# Altium PCB PCB.PcbDoc (part 2 of 2)
Units mil, origin at the board's own origin, x right, y up, seen from the top; angles counter-clockwise.
Board outline 2657.48 x 2755.91 mil, 2 copper layers (Top Layer, Bottom Layer), stack 62.2 mil thick; 84 components, 72 nets, 315 pads, 78 vias.
Unrouted connection lines stored in the file: 31.
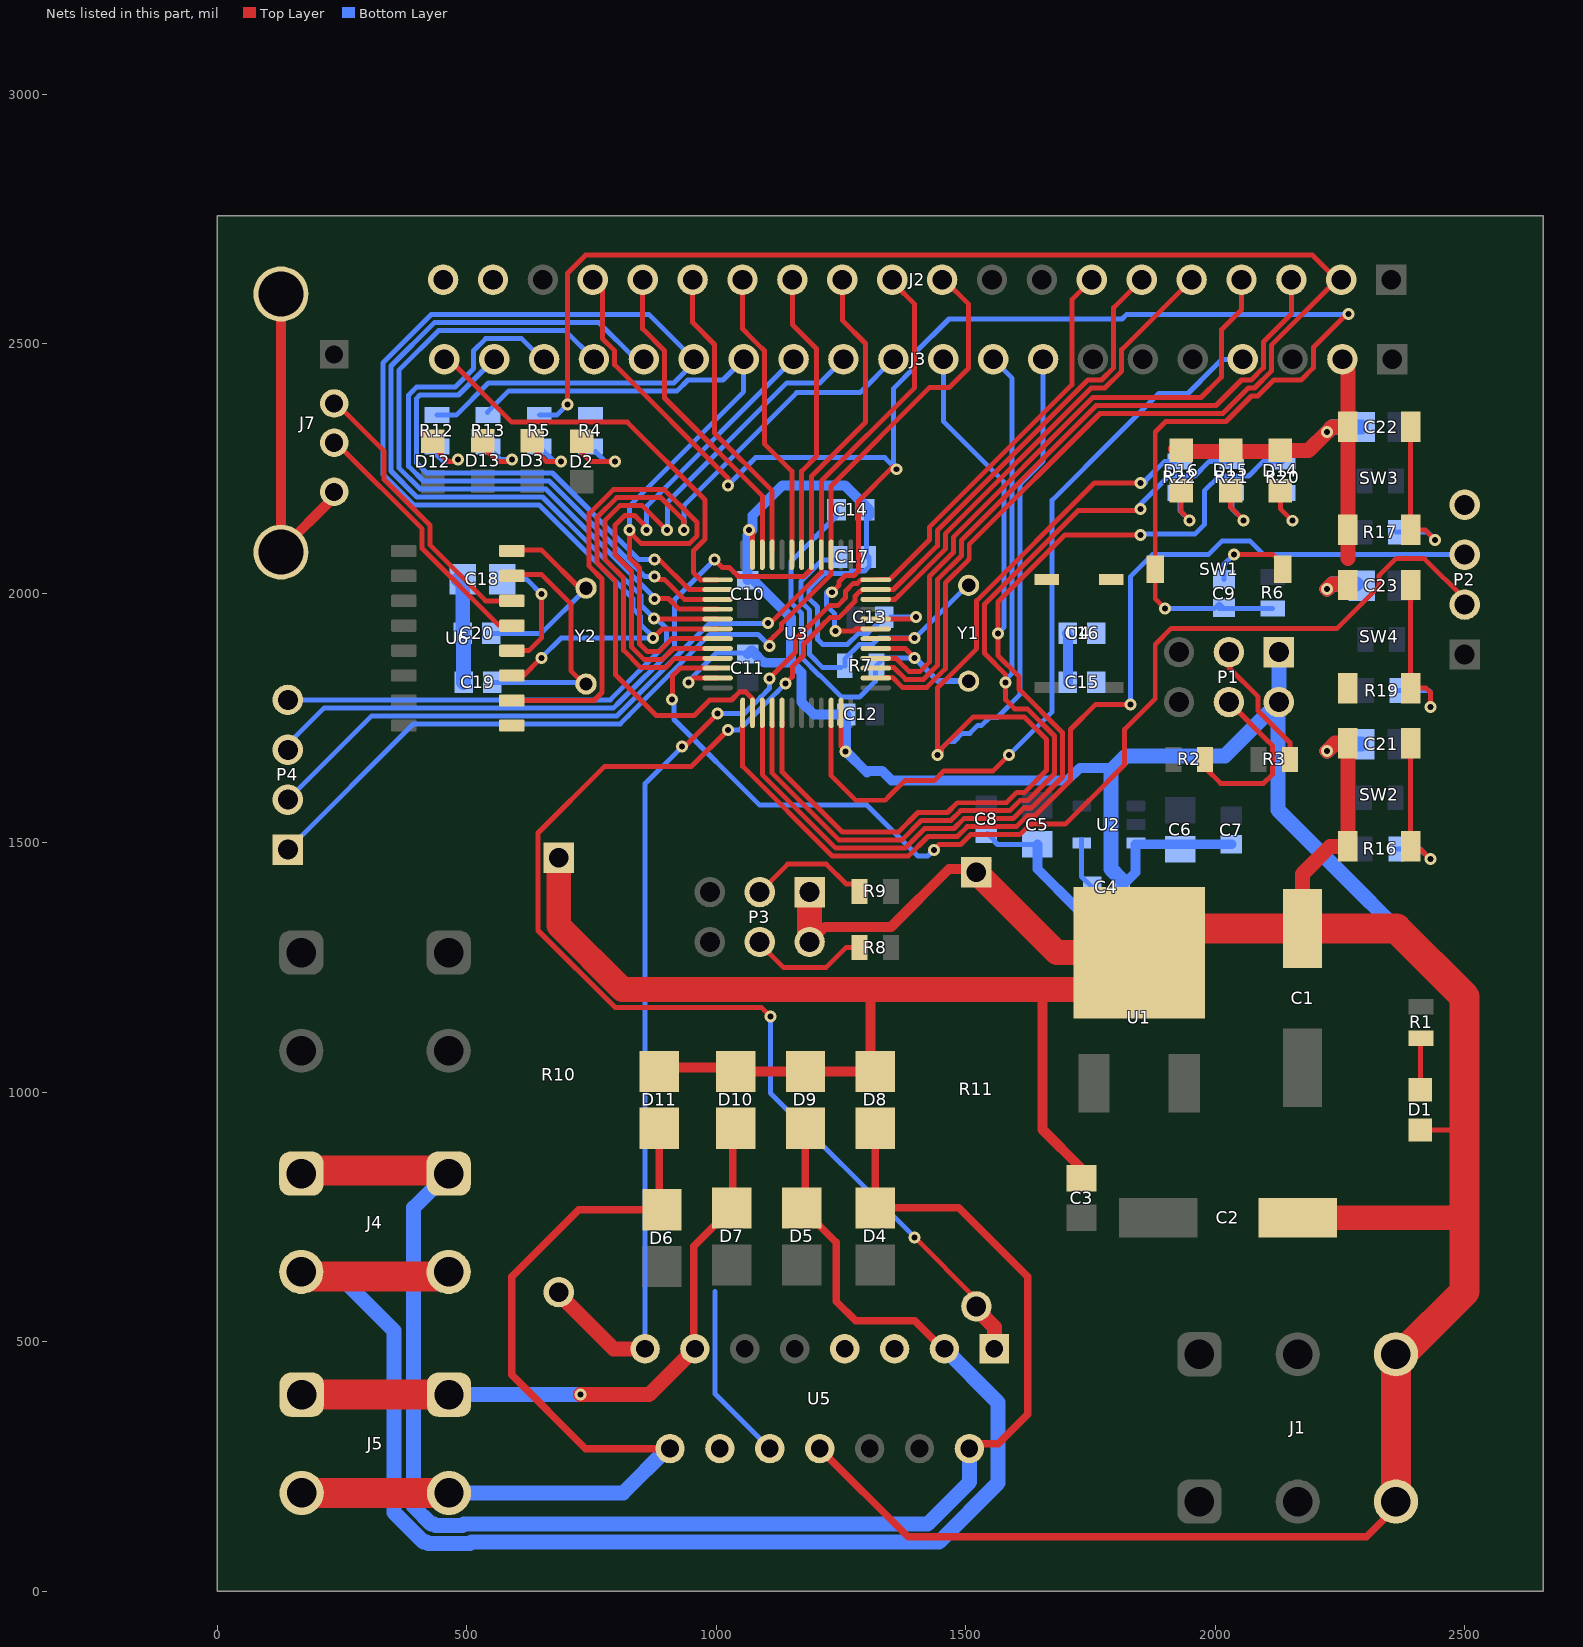
[diagram p2: the nets of this part, all layers, seen from the top]

## Via types
v1: diameter 24, hole 12, Top Layer to Bottom Layer, 77 vias
v2: diameter 50, hole 24, Top Layer to Bottom Layer, 1 vias

## Nets (pads, with @x,y where several pads share a name; then routed paths per layer and width w, separated by ;. In a path a pad name is that pad's centre, name@x,y a point inside that pad or via, vN(x,y) a via of type N, cw(c..) or ccw(c..) an arc to the next point about the centre after c; other vN are vias at no path point) (continued)
GND: C1.1 C2.1 C3.1 C4.1 C5.1 C6.1 C7.1 C8.1 C10.1 C11.1 C12.1 C13.1 C14.2 C15.2 C16.2 C17.2 C18.2 C19.2 C20.2 C21.1 C22.1 C23.1 D1.2 D8.2 D9.2 D10.2 D11.2 D14.2 D15.2 D16.2 J1.3 J2.19 J2.20 J3.2 J7.4 J7.5 J7.6 P1.1 P1.2 P2.4 P3.1 P3.2 R4.2 R10.1 R11.1 SW2.3 SW2.4 SW3.3 SW3.4 SW4.3 SW4.4 U1.4 U2.3 U3.8 U3.23 U3.35 U3.47 U5.8 U6.1 | length 14428
  Top Layer w10: v1(944.88,1820.87) 953.74,1829.72 U3.35@1002.95,1829.72 ; v1(1065.52,2125.98) 1072.83,2125.98 U3.23@1072.83,2076.77 ; U3.47@1250,1759.84 1250,1692.91 v1@1259.84,1683.07 ; U3.8@1319.88,1947.83 1396.65,1947.83 v1@1397.64,1948.82 ; D1.2@2411.38,923.85 2500,923.85 2508.5,923.85 2509.84,925.2
  Top Layer w15: U5.8@1207.48,285.43 1384.65,108.27 2303.15,108.27 2352.36,157.48 J1.3@2352.36,177.17
  Top Layer w20: J7.5@127.8,2603.61 J7.5@127.8,2599.24 127.8,2086.29 234.49,2192.98 J7.4@234.49,2202.79 J7.4@234.49,2207.16 ; D11.2@899.1,1049.21 D10.2@1032,1049.21 ; D10.2@1039.06,1041.34 1169.29,1041.34 1171.26,1043.31 1173.23,1041.34 D9.2@1178.98,1041.34 D8.2@1318.9,1041.34 ; P3.2@1187.2,1314.22 P3.2@1187.2,1300.65 1217.71,1331.16 1350.85,1331.16 1466.54,1446.85 R11.1@1509.92,1446.85 ; D8.2@1309.06,1061.02 1309.06,1200.79 ; 1653.54,1205.71 1653.54,925.2 C3.1@1732.28,846.46
  Top Layer w30: D16.2@1920.87,2288.9 D16.2@1923.93,2285.84 ; D16.2@1927.81,2283.46 D15.2@2017.72,2283.46 ; D15.2@2027.56,2283.46 2125.51,2283.46 D14.2@2126.65,2284.6 ; D14.2@2130.51,2285.7 2187.27,2285.7 v1(2224.41,2322.83) 2234.25,2332.68 SW3.3@2253.94,2332.68 ; C1.1@2175.2,1377.95 2175.2,1437.01 2230.47,1492.28 SW2.4@2265.75,1492.28 SW2.3@2265.75,1698.98 2240.31,1698.98 v1(2224.41,1683.07) ; v1(2224.41,2007.87) 2234.25,2017.72 SW4.3@2265.75,2017.72 ; J3.2@2253.94,2480.32 2265.75,2468.5 2265.75,2126.46 2265.76,2068.91
  Top Layer w50: R10.1@684.55,1469.44 684.55,1333.17 812.01,1205.71 1653.54,1205.71 U1.4@1756.41,1205.71 ; P3.2@1187.2,1314.22 P3.1@1187.2,1400.65 ; R11.1@1521.41,1440.71 1682.73,1279.39 U1.4@1847.68,1279.39 ; C2.1@2165.35,748.03 2490.16,748.03 2500,757.87
  Top Layer w60: U1.4@1840.55,1279.53 1888.76,1327.74 C1.1@2175.2,1327.74 2363.21,1327.74 2500,1190.94 2500,923.85 2500,757.87 2500,600.39 J1.3@2376.97,477.36 ; J1.3@2362.2,179.13 J1.3@2362.2,472.44
  Bottom Layer w10: v1(944.88,1820.87) 944.88,1824.5 1000.3,1879.92 C11.1@1053.15,1879.92 ; C14.2@1298.23,2166.95 1301.17,2164.01 C17.2@1301.17,2072.24 ; C17.2@1306.77,2072.24 1306.77,2053.43 1297.64,2044.29 1272.04,2044.29 1267.34,2039.59 1220.83,2039.59 1219.08,2041.33 1185.62,2007.87 1185.62,1989.72 1203.26,1972.09 1203.26,1906.97 1213.57,1896.65 1262.97,1896.65 1285.43,1919.12 1303.98,1919.12 C13.1@1336.63,1951.77 ; C13.1@1347.28,1948.82 1350.23,1951.77 v1(1400.17,1951.77) ; R11.1@1543.88,1463.26 R11.1@1546.83,1463.26 ; C8.1@1544.13,1518.17 1557.83,1504.47 1557.83,1501.92 1563.69,1496.06 C5.1@1643.71,1496.06
  Bottom Layer w20: C11.1@1062.99,1877.95 1070.05,1885.01 1072.83,1885.01 1075.28,1882.56 1075.28,1880.45 1094.03,1861.7 1096.14,1861.7 1097.59,1860.26 1146.31,1860.26 1148.85,1862.79 1171.26,1840.38 ; C10.1@1062.99,2025.59 1062.99,2027.56 1062.99,2116.14 v1@1069.18,2122.33 ; v1(1065.52,2125.98) v1@1069.18,2122.33 ; C10.1@1072.83,2027.56 1150.26,1950.13 1150.26,1870.08 1150.26,1864.21 ; 1171.26,1838.38 1171.26,1781.17 1195.85,1756.57 C12.1@1260.84,1756.57 ; v1(1259.04,1682.72) 1259.84,1683.53 C12.1@1259.84,1751.97 ; v1@1259.84,1683.07 1302.43,1640.49 1305.64,1643.7 1332.15,1643.7 1351.84,1624.02 1703.21,1624.02 1728.68,1649.49 1785.74,1649.49 1791.34,1643.9 1791.34,1643.7 ; C14.2@1306.77,2155.51 1306.77,2166.95 1257.84,2215.88 1133.2,2215.88 1072.83,2155.51 1072.83,2125.98 v1@1069.18,2122.33 ; C5.1@1643.71,1496.06 1643.71,1446.84 1722.44,1368.11 1781.5,1368.11 1810.75,1397.37 C4.1@1810.75,1410.09 ; C16.2@1702.76,1919.29 1704.72,1917.32 C15.2@1704.72,1820.87 ; C4.1@1819.42,1418.77 1840.55,1439.89 1840.55,1496.06 1841.02,1496.53 1930.07,1496.53 C7.1@2032.6,1496.53
  Bottom Layer w30: C18.2@482.28,2027.56 492.13,2017.72 C20.2@492.13,1919.29 ; C19.2@494.09,1820.87 C20.2@494.09,1909.45 ; C4.1@1811.02,1427.17 1791.34,1446.85 1791.34,1643.7 1820.87,1673.23 2019.29,1673.23 P1.2@2127.56,1781.5 2127.56,1868.5 P1.1@2125.98,1870.08 ; P1.2@2125.98,1771.65 2125.98,1564.96 2500,1190.94 2500,600.39 J1.3@2374.02,474.41 ; v1(2224.41,1683.07) 2238.39,1697.05 C21.1@2292.98,1697.05 ; v1(2224.41,2007.87) 2234.25,2017.72 C23.1@2283.46,2017.72 ; v1(2224.41,2322.83) 2234.25,2332.68 C22.1@2293.31,2332.68
  Bottom Layer w60: J1.3@2362.2,474.41 J1.3@2374.02,474.41
ISEN_A: J2.6 R11.2 U3.11 U5.1 | length 3372.7
  Top Layer w10: v1(1023.62,1725.66) 950.6,1652.63 776.65,1652.63 643.04,1519.02 643.04,1504.51 643.04,1434.37 643.04,1323.77 797.1,1169.71 1090.64,1169.71 v1(1108.78,1151.57) ; v1(1139.26,1818.65) 1152.69,1832.09 1152.69,1852.51 1175.02,1874.84 1175.02,1896.92 1211.84,1933.73 1211.84,1934.84 1227.66,1950.65 1245.8,1950.65 1278.37,1983.23 1278.37,1993.8 1287.83,2003.26 1289.53,2003.26 1293.16,2006.89 U3.11@1319.88,2006.89 1355.53,2006.89 1443.17,2094.53 1443.17,2125.24 1744.76,2426.83 1772.29,2426.83 1796.61,2451.15 1796.61,2571.81 J2.6@1852.76,2627.95 ; v1(1397.64,708.66) 1521.41,584.89 R11.2@1521.41,570.24
  Top Layer w30: R11.2@1525.59,570.87 1525.59,561.02 1557.48,529.13 U5.1@1557.48,485.43
  Bottom Layer w10: v1(1023.62,1725.66) 1046.26,1725.66 1063.04,1742.43 1063.1,1742.43 1122.65,1801.98 1122.65,1802.04 v1(1139.26,1818.65) ; v1(1108.78,1151.57) 1108.78,997.52 v1(1397.64,708.66)
ISEN_B: J2.7 R10.2 U3.12 U5.15 | length 2807.6
  Top Layer w10: v1(931.71,1692.11) 932.51,1692.91 937.43,1692.91 v1(1002.95,1758.43) ; v1(1106.65,1828.26) 1107.28,1828.9 1107.28,1829.72 1159.02,1881.46 1159.02,1906.75 1226.82,1974.54 1243.37,1974.54 1259.18,1990.36 1259.18,2003.7 1274.74,2019.26 1282.91,2019.26 1290.22,2026.57 1319.88,2026.65 1347.52,2026.65 1427.17,2106.3 1427.17,2131.87 1712.6,2417.3 1712.6,2444.51 1712.61,2492.17 ; 1712.6,2492.18 1712.6,2587.8 J2.7@1752.76,2627.95
  Top Layer w30: R10.2@688.98,590.55 794.09,485.43 U5.15@857.48,485.43
  Bottom Layer w10: U5.15@857.48,485.43 857.48,1617.88 v1(931.71,1692.11) ; v1(1002.95,1758.43) 1056.47,1758.43 1089.2,1791.17 1106.65,1808.61 v1(1106.65,1828.26)
L298N_IN1: J2.10 P4.1 U3.15 U5.5 | length 2097.4
  Top Layer w10: v1(1107.28,1893.7) 1107.28,1904.55 1115.31,1912.58 1131.12,1928.39 1131.12,1938.67 1230.32,2037.86 U3.15@1230.32,2076.77 1230.32,2214.57 1427.17,2411.42 1466.54,2411.42 1505.91,2450.79 1505.91,2578.74 J2.10@1456.69,2627.95
  Bottom Layer w10: P4.1@141.6,1485.79 393.6,1737.79 705.56,1737.79 705.98,1737.37 772.47,1737.37 772.88,1737.79 807.92,1737.79 823.92,1753.79 987.43,1917.3 1083.68,1917.3 v1(1107.28,1893.7)
L298N_IN2: J2.11 P4.2 U3.16 U5.7 | length 1928.4
  Top Layer w10: v1(1104.12,1939.58) 1102.19,1937.65 1104.47,1935.38 1210.63,2041.54 U3.16@1210.63,2076.77 1210.63,2224.41 1397.64,2411.42 1397.64,2578.74 J2.11@1358.27,2618.11
  Bottom Layer w10: P4.2@141.6,1585.79 309.6,1753.79 712.19,1753.79 712.6,1753.37 765.84,1753.37 766.25,1753.79 801.29,1753.79 932.51,1885.01 986.3,1938.8 1090.96,1938.8 ; v1@1099.86,1943.84 v1(1104.12,1939.58)
L298N_IN3: J2.12 P4.3 U3.17 U5.10 | length 2274.3
  Top Layer w10: v1(996.62,2066.93) 1012.37,2051.18 1026.45,2051.18 1035.14,2042.5 1044.71,2032.93 1175.52,2032.93 1190.94,2048.35 U3.17@1190.94,2076.77 ; U3.17@1190.94,2096.86 1190.94,2234.25 1299.21,2342.52 1299.21,2500 1252.76,2546.46 J2.12@1252.76,2627.95
  Bottom Layer w10: P4.3@141.6,1685.79 141.6,1696.72 214.67,1769.79 718.82,1769.79 719.23,1769.37 759.21,1769.37 759.63,1769.79 794.66,1769.79 806.37,1781.5 916.51,1891.64 916.51,1935.76 916.51,1986.82 v1(996.62,2066.93) ; 998.01,600.64 998.01,394.91 U5.10@1107.48,285.43
L298N_IN4: J3.16 P4.4 U3.29 U5.12 | length 2444.8
  Top Layer w10: v1(875.15,1949.1) 875.71,1949.1 876.97,1947.83 U3.29@1002.95,1947.83
  Bottom Layer w10: P4.4@141.6,1785.79 725.44,1785.79 725.86,1785.37 752.58,1785.37 753,1785.79 788.03,1785.79 900.51,1898.27 900.51,1929.13 880.55,1949.1 v1(875.15,1949.1) v1@875.71,1949.1 ; J3.16@855.1,2468.35 838.74,2468.35 765.23,2541.86 524.65,2541.86 485.56,2541.84 435.25,2541.86 348.17,2454.78 348.17,2244.37 400.13,2192.41 652.08,2192.41 752.49,2092 848.98,1995.5 848.98,1975.82 868.94,1955.87 v1@875.98,1948.82
LED1: J3.10 R20.1 U3.39 | length 2551.9
  Top Layer w10: U3.39@1092.52,1732.28 1092.52,1635.89 1239.76,1488.65 1378.4,1488.65 1417.77,1528.02 1476.77,1528.02 1496.46,1547.7 1594.88,1547.7 1615.88,1568.7 1631.44,1568.7 1694.12,1631.38 1694.12,1720.02 1607.17,1806.97 1607.17,1832.05 1564.96,1874.25 v1(1564.96,1919.29) 1564.96,1982.3 1698.8,2116.14 v1(1850.39,2116.14)
  Bottom Layer w10: J3.10@1455.1,2468.35 1455.1,2344.12 1577.23,2221.98 1577.23,2047.24 ; v1(1564.96,1919.29) 1577.23,1931.56 1577.23,2044.82 ; v1(1850.39,2116.14) 1852.92,2118.67 1937.64,2118.67 1960,2118.67 1967.32,2125.98 1978.35,2137.01 1978.35,2204.72 2007.87,2234.25 2066.93,2234.25 2096.46,2263.78 R20.1@2135.83,2263.78
LED2: J3.9 R21.1 U3.40 | length 2486
  Top Layer w10: U3.40@1112.2,1742.99 1112.2,1638.83 1246.39,1504.65 1371.72,1504.65 1411.09,1544.02 1470.14,1544.02 1489.83,1563.7 1588.26,1563.7 1609.25,1584.7 1624.81,1584.7 1678.12,1638.01 1678.12,1713.39 1623.54,1767.97 1598.17,1767.97 1580.17,1785.98 v1(1580.17,1820.87) 1580.17,1836.42 1537.96,1878.63 1537.96,1908.11 1537.96,1977.93 1725.38,2165.35 v1@1850.39,2165.35
  Bottom Layer w10: J3.9@1555.1,2468.35 1593.23,2430.22 1593.23,2126.65 1593.23,1839.29 1577.48,1823.55 v1(1580.17,1820.87) ; v1@1850.39,2165.35 1850.39,2178.2 1869.6,2197.41 1893.29,2221.09 1906.45,2234.25 1958.66,2234.25 1988.43,2264.02 R21.1@2033.31,2264.02
  other v1: 1850.39,2168.27
LED3: J3.8 R22.1 U3.41 | length 2844
  Top Layer w10: U3.41@1131.89,1742.13 1131.89,1641.77 1253.02,1520.65 1365.09,1520.65 1404.46,1560.02 1463.52,1560.02 1483.2,1579.7 1581.63,1579.7 1602.63,1600.7 1618.18,1600.7 1662.12,1644.63 1662.12,1706.77 1616.92,1751.97 1515.36,1751.97 1450.28,1686.88 1450.28,1675.7 v1(1443.28,1675.7) 1443.28,1809.65 1475.17,1841.54 1521.96,1888.34 1521.96,1984.56 1757.8,2220.4 v1@1854.41,2220.4
  Bottom Layer w10: v1(1443.28,1675.7) 1445.75,1673.23 1450.28,1673.23 1450.28,1686.88 1466.09,1702.7 1477.46,1702.7 1493.46,1718.7 1508.5,1718.7 1524.5,1734.7 1532.02,1734.7 1548.02,1750.7 1563.09,1750.7 1609.23,1796.84 1609.23,2218.25 1655.1,2264.12 J3.8@1655.1,2468.35 ; v1@1854.41,2220.4 1860.24,2220.4 1860.24,2225.32 1898.7,2263.78 R22.1@1919.29,2263.78
  other v1: 1850.39,2220.4
NetC4_2: C4.2 U2.4 | length 104.7
  Bottom Layer w10: U2.4@1732.28,1505.91 1732.28,1431.48 C4.2@1753.67,1410.09
NetC9_1: C9.1 SW1.1 | length 150
  Top Layer w10: v1(2037.4,2076.77) 2116.14,2076.77 SW1.1@2125.98,2066.93
  Bottom Layer w10: C9.1@2017.72,2027.56 2017.72,2057.09 v1(2037.4,2076.77)
NetC19_1: C19.1 U6.7 Y2.2 | length 480.2
  Top Layer w10: U6.7@610.24,2037.4 649.61,2037.4 708.66,1978.35 708.66,1844.27 Y2.2@739.01,1813.92
  Bottom Layer w10: C19.1@551.18,1820.87 718.16,1820.87 725.11,1813.92 Y2.2@721.64,1813.92
NetC20_1: C20.1 U6.8 Y2.1 | length 395.8
  Top Layer w10: U6.8@600.39,2086.61 649.61,2086.61 730.18,2006.04 Y2.1@739.01,2006.04
  Bottom Layer w10: C20.1@551.18,1919.29 649.61,1919.29 736.36,2006.04 Y2.1@739.01,2006.04
NetD1_1: D1.1 R1.2 | length 104.3
  Top Layer w10: D1.1@2411.42,1003.94 2411.42,1106.61 R1.2@2412.56,1107.75
NetD2_2: D2.2 R4.1 | length 144.2
  Top Layer w10: D2.2@730.53,2303.96 730.53,2281.28 748.03,2263.78 v1(797.24,2263.78)
  Bottom Layer w10: R4.1@757.87,2283.46 777.56,2263.78 v1(797.24,2263.78)
NetD3_2: D3.2 R5.1 | length 138.3
  Top Layer w10: D3.2@631.16,2305.1 631.16,2292.07 659.45,2263.78 v1(688.98,2263.78)
  Bottom Layer w10: R5.1@645.51,2293.31 675.04,2263.78 v1(688.98,2263.78)
NetD4_2: D4.2 D8.1 J4.1 U5.2 | length 3149.7
  Top Layer w15: D4.2@1318.9,767.72 1486.22,767.72 1624.02,629.92 1624.02,354.33 1564.96,295.28 U5.2@1515.75,295.28 ; D4.2@1318.9,777.56 D8.1@1318.9,927.17
  Top Layer w60: J4.1@176.33,842.95 J4.1@468.34,842.95
  Bottom Layer w30: J4.1@468.34,842.95 393.7,768.32 393.7,169.02 428.3,134.43 434.32,134.43 437.52,131.22 491.61,131.22 494.81,134.43 1423.8,134.43 1507.48,218.11 U5.2@1507.48,285.43
NetD5_2: D5.2 D9.1 J4.2 U5.3 | length 3115.8
  Top Layer w15: D5.2@1176.18,762.8 1240.16,698.82 1240.16,580.71 1279.53,541.34 1397.64,541.34 U5.3@1446.85,492.13 ; D9.1@1178.98,927.17 1178.98,769.84 D5.2@1181.1,767.72
  Top Layer w60: J4.2@168.62,639.6 178.3,629.92 454.22,629.92 J4.2@463.9,639.6
  Bottom Layer w30: J4.2@167.32,639.76 236.22,639.76 354.33,521.65 354.33,157.48 413.39,98.43 419.41,98.43 422.61,95.22 506.52,95.22 509.72,98.43 1446.85,98.43 1564.96,216.54 1564.96,377.95 U5.3@1457.48,485.43
NetD6_2: D6.2 D11.1 J5.2 U5.14 | length 1853.1
  Top Layer w15: D6.2@885.83,764.26 724.89,764.26 590.55,629.92 590.55,433.07 738.19,285.43 U5.14@907.48,285.43 ; D6.2@885.83,767.72 D11.1@885.83,927.17
  Top Layer w60: J5.2@169.29,196.85 J5.2@462.6,196.85
  Bottom Layer w30: J5.2@464.57,196.85 813.78,196.85 U5.14@902.36,285.43
NetD7_2: D7.2 D10.1 J5.1 U5.13 | length 1314.8
  Top Layer w15: U5.13@954.72,482.28 954.72,690.94 D7.2@1031.34,767.56 ; D7.2@1033.46,748.03 1033.46,921.57 D10.1@1039.06,927.17
  Top Layer w30: v1(728.35,393.7) 865.75,393.7 U5.13@957.48,485.43
  Top Layer w60: J5.1@169.29,393.7 J5.1@462.6,393.7
  Bottom Layer w30: J5.1@472.44,393.7 v1(728.35,393.7)
NetD12_2: D12.2 R12.1 | length 132.8
  Top Layer w10: D12.2@433.07,2293.31 462.6,2263.78 482.28,2263.78 v1(482.28,2267.41)
  Bottom Layer w10: R12.1@440.47,2293.31 440.47,2276.07 452.76,2263.78 482.28,2263.78 v1(482.28,2267.41)
NetD13_2: D13.2 R13.1 | length 132.6
  Top Layer w10: D13.2@531.79,2305.09 531.79,2293.01 561.02,2263.78 590.55,2263.78 v1(590.55,2267.41)
  Bottom Layer w10: R13.1@551.18,2283.46 567.24,2267.41 v1(590.55,2267.41)
NetD14_1: D14.1 R20.2 | length 69.8
  Top Layer w10: D14.1@2130.51,2204.7 2130.51,2168.91 v1(2154.58,2144.84)
NetD15_1: D15.1 R21.2 | length 135.5
  Top Layer w10: D15.1@2031.14,2205.34 2031.14,2171.61 v1(2057.09,2145.67)
  Bottom Layer w10: R21.2@2033.31,2200.87 2033.31,2169.45 v1(2057.09,2145.67)
NetD16_1: D16.1 R22.2 | length 123.4
  Top Layer w10: D16.1@1931.77,2204.66 1931.77,2162.71 v1(1948.82,2145.67)
  Bottom Layer w10: R22.2@1929.13,2194.88 1929.13,2165.35 v1(1948.82,2145.67)
NetJ7_2: J7.2 U6.6 | length 578
  Top Layer w10: J7.2@234.49,2384.32 334.65,2284.16 334.65,2227.35 426.8,2135.19 426.8,2095.82 538.18,1984.45 U6.6@590.55,1984.45
NetJ7_3: J7.3 U6.5 | length 540
  Top Layer w10: J7.3@234.49,2305.58 234.49,2293.31 246.06,2293.31 410.8,2128.57 410.8,2089.2 565.55,1934.45 U6.5@590.55,1934.45
NetP1_3: P1.3 R3.2 | length 265.7
  Top Layer w10: P1.3@2027.56,1881.5 2027.56,1850.39 2086.05,1791.91 2086.05,1764.3 2086.61,1763.73 2149.77,1700.58 R3.2@2149.77,1666.38
NetP1_4: P1.4 R2.1 | length 354
  Top Layer w10: R2.1@1979.66,1666.38 1979.66,1649.77 2010.95,1618.48 2096.98,1618.48 2115.3,1636.79 2115.3,1693.75 2113.52,1695.53 2113.52,1695.78 2107.08,1702.22 2106.83,1702.22 P1.4@2027.56,1781.5
NetP3_3: P3.3 R9.2 | length 247.6
  Top Layer w10: P3.3@1087.2,1400.65 1143.24,1456.69 1220.86,1456.69 1260.23,1417.32 1286.19,1417.32 R9.2@1292.59,1410.93
NetP3_4: P3.4 R8.1 | length 242.4
  Top Layer w10: P3.4@1082.68,1301.75 1134.43,1250 1220.47,1250 1259.84,1289.37 R8.1@1287.32,1289.37
NetR16_2: R16.2 SW2.1 SW2.2 | length 315.1
  Top Layer w10: SW2.2@2391.73,1492.28 SW2.1@2391.73,1692.91 ; SW2.2@2401.57,1486.22 2411.42,1486.22 v1(2431.1,1466.54)
  Bottom Layer w10: R16.2@2362.88,1487.09 2410.55,1487.09 v1(2431.1,1466.54)
NetR17_2: R17.2 SW3.1 SW3.2 | length 343
  Top Layer w10: SW3.1@2381.89,2332.68 2391.74,2322.82 SW3.2@2391.74,2126.46 ; SW3.2@2401.57,2125.98 2421.26,2125.98 v1(2440.94,2106.3)
  Bottom Layer w10: R17.2@2362.2,2121.89 2425.35,2121.89 v1(2440.94,2106.3)
NetR19_2: R19.2 SW4.1 SW4.2 | length 377.3
  Top Layer w10: SW4.1@2391.73,2017.72 SW4.2@2391.73,1809.37 2422.91,1809.37 2431.1,1801.18 v1(2431.1,1771.65)
  Bottom Layer w10: R19.2@2365.3,1804.49 2427.8,1804.49 2431.1,1801.18 v1(2431.1,1771.65)
OSCIN: C14.1 R7.1 U3.5 Y1.2 | length 860.4
  Top Layer w10: U3.5@1319.88,1888.78 1378.94,1888.78 v1(1397.64,1870.08)
  Bottom Layer w10: C14.1@1241.14,2166.95 1241.14,2154.4 1150.26,2063.52 1150.26,1979.83 1171.26,1958.83 1171.26,1871.64 1171.26,1870.08 1206.95,1834.39 1208.51,1834.39 1251.56,1791.34 1287.12,1791.34 1318.9,1823.12 R7.1@1318.9,1850.39 ; R7.1@1320.93,1854.17 1336.84,1870.08 v1(1397.64,1870.08)
  Bottom Layer w12: v1(1397.64,1870.08) 1444.49,1823.23 Y1.2@1505.91,1823.23
OSCOUT: C17.1 R7.2 U3.6 Y1.1 | length 720.5
  Top Layer w10: U3.6@1319.88,1908.46 1396.65,1908.46 v1(1397.64,1909.45)
  Bottom Layer w10: C17.1@1239.47,2066.1 1212.73,2066.1 1169.62,2023 1169.62,2009.51 1169.62,1983.1 1187.26,1965.46 1187.26,1876.71 1213.57,1850.39 R7.2@1250,1850.39 ; R7.2@1257.78,1854.17 1257.78,1868.02 1286.42,1896.65 1313.01,1896.65 1325.8,1909.45 v1(1397.64,1909.45) 1496.06,2007.87 1505.91,2007.87 Y1.1@1505.91,2015.35
PA0: J2.5 U3.10 | length 941.6
  Top Layer w10: U3.10@1319.88,1987.2 1358.47,1987.2 1365.84,1994.57 1459.17,2087.9 1459.17,2118.61 1751.39,2410.83 1778.92,2410.83 1812.61,2444.52 1812.61,2487.81 J2.5@1952.76,2627.95
PA9: J3.15 R12.2 U3.30 U6.3 | length 2641.5
  Top Layer w10: U6.3@590.55,1834.45 613.98,1834.45 v1(649.61,1870.08) ; v1(873.51,1909.45) 886.16,1922.1 886.34,1922.1 892.39,1928.15 U3.30@1002.95,1928.15
  Bottom Layer w10: R12.2@440.47,2356.46 478.92,2356.46 543.72,2421.26 915.35,2421.26 954.72,2460.63 J3.15@954.72,2470.47 ; 492.17,2557.86 430.43,2557.86 428.63,2557.86 332.17,2461.4 332.17,2459.6 332.17,2237.74 393.5,2176.41 645.45,2176.41 736.49,2085.37 771.27,2050.59 832.98,1988.88 832.98,1969.19 848.15,1954.02 848.15,1937.28 v1@874.75,1910.68 ; 492.19,2557.84 518,2557.84 710.84,2557.86 865.59,2557.86 J3.15@955.1,2468.35 ; v1(649.61,1870.08) 688.98,1909.45 v1(873.51,1909.45)
PA10: J3.14 R13.2 U3.31 U6.2 | length 2406.8
  Top Layer w10: U6.2@590.55,1784.45 755.17,1784.45 771.27,1800.55 771.27,1804.06 771.48,1804.27 771.48,1830.99 771.27,1831.2 771.27,1996.19 771.48,1996.4 771.48,2023.12 771.27,2023.33 771.27,2027.96 745.56,2053.67 745.56,2090.92 745.56,2112.33 745.56,2158.92 793.83,2207.2 869.64,2207.2 896.14,2207.2 951.04,2152.3 962.04,2141.3 962.04,2114.8 946.22,2098.98 923.86,2098.98 871.96,2098.98 849.59,2098.98 833.77,2114.8 833.77,2118.98 v1(826.77,2125.98) 826.77,2069.87 846.46,2050.19 846.46,1899.61 846.51,1899.55 846.51,1898.27 862.33,1882.45 884.7,1882.45 910.71,1908.46 U3.31@1002.95,1908.46
  Bottom Layer w10: R13.2@541.34,2362.2 584.39,2405.26 921.98,2405.26 943.56,2426.83 1013.59,2426.83 J3.14@1055.1,2468.35 1055.1,2403.52 826.77,2175.2 v1(826.77,2125.98)
PA11: J3.13 U3.32 | length 1004
  Top Layer w10: v1(860.77,2125.98) 856.3,2125.98 856.3,2135.83 836.61,2155.51 816.93,2155.51 797.24,2135.83 797.24,2076.77 830.46,2043.56 830.46,1892.98 830.51,1892.92 830.51,1891.64 855.7,1866.45 892.04,1866.45 914.37,1888.78 U3.32@1002.95,1888.78
  Bottom Layer w10: v1(860.77,2125.98) 860.77,2174.02 J3.13@1155.1,2468.35
PA12: J3.12 U3.33 | length 1171
  Top Layer w10: v1(901.04,2125.98) 851.83,2175.2 807.09,2175.2 777.56,2145.67 777.56,2066.93 814.46,2030.03 814.46,1886.35 814.51,1886.3 814.51,1885.01 849.07,1850.45 866.09,1850.45 885.88,1850.45 895.72,1850.45 898.67,1850.45 917.31,1869.09 U3.33@1002.95,1869.09
  Bottom Layer w10: v1(901.04,2125.98) 903.28,2128.22 902.5,2129 902.5,2135.83 902.5,2182.02 1141.73,2421.26 1208.01,2421.26 J3.12@1255.1,2468.35
PA15: J3.11 U3.38 | length 1512
  Top Layer w10: v1(935.04,2125.98) 935.04,2145.67 889.51,2191.2 800.46,2191.2 761.56,2152.3 761.56,2062.65 761.56,2060.3 798.46,2023.4 798.46,1835.71 879.67,1754.5 933.7,1754.5 956.07,1754.5 961.41,1759.84 987,1785.43 1030.63,1785.43 1046.55,1801.35 1059.74,1801.35 1072.83,1788.26 U3.38@1072.83,1759.84
  Bottom Layer w10: v1(935.04,2125.98) 935.04,2175.2 1161.42,2401.57 1288.33,2401.57 J3.11@1355.1,2468.35
PB0: J2.13 U3.18 | length 573.5
  Top Layer w10: J2.13@1152.76,2627.95 1152.76,2538.19 1200.79,2490.16 1200.79,2273.62 1171.26,2244.09 U3.18@1171.26,2086.61
PB1: J2.14 U3.19 | length 592.1
  Top Layer w10: J2.14@1052.76,2627.95 1052.76,2529.39 1072.29,2509.86 1092.52,2489.63 1096.61,2485.54 1096.61,2451.15 1096.61,2299.06 1151.57,2244.09 1151.57,2105.19 U3.19@1151.57,2076.77
PB9: J3.4 U3.46 | length 1568
  Top Layer w10: U3.46@1230.32,1742.13 1230.32,1633.86 1279.47,1584.7 1307.71,1584.7 1338.64,1584.7 1348.43,1594.49 1377.95,1624.02 1437.01,1624.02 1456.69,1643.7 1555.12,1643.7 v1(1587.12,1675.7)
  Bottom Layer w10: v1(1587.12,1675.7) 1673.23,1761.81 1673.23,2186.1 1803.1,2315.97 1887.1,2399.97 1945.43,2399.97 1996.61,2451.15 2013.8,2468.35 J3.4@2055.1,2468.35
PB10: J2.15 U3.21 | length 607.4
  Top Layer w10: J2.15@952.76,2627.95 952.76,2541.99 996.61,2498.14 996.61,2485.54 996.61,2451.15 996.61,2320.32 1112.2,2204.72 U3.21@1112.2,2086.61
PB11: J2.16 U3.22 | length 650.5
  Top Layer w10: J2.16@852.76,2627.95 852.76,2529.39 896.61,2485.54 896.61,2390.79 1092.52,2194.88 U3.22@1092.52,2076.77
PB12: J3.20 U3.25 | length 849.2
  Top Layer w10: J3.20@455.1,2468.35 464.72,2468.35 590.55,2342.52 821.98,2342.52 978.04,2186.46 978.04,2118.59 978.04,2108.17 954.72,2084.86 954.72,2040.62 968.77,2026.57 U3.25@1002.95,2026.57
PB13: J3.19 U3.26 | length 1025.4
  Top Layer w10: v1(875.98,2066.93) 885.83,2066.93 945.87,2006.89 U3.26@1002.95,2006.89
  Bottom Layer w10: J3.19@555.1,2468.35 513.59,2426.83 483.61,2396.86 446.07,2396.86 406.49,2396.86 399.86,2390.24 399.86,2321.37 399.86,2260.56 420.01,2240.41 671.96,2240.41 835.4,2076.97 845.44,2066.93 v1(875.98,2066.93)
PB14: J3.18 U3.27 | length 1225.7
  Top Layer w10: v1(875.98,2032.93) 875.98,2027.56 895.67,2027.56 936.02,1987.2 U3.27@1002.95,1987.2
  Bottom Layer w10: J3.18@649.61,2470.47 610.24,2509.84 572.31,2509.84 549.04,2509.86 537.9,2509.86 513.59,2485.54 513.59,2449.46 496.61,2432.49 476.99,2412.86 399.86,2412.86 392.25,2405.26 383.86,2396.86 383.86,2344.68 383.86,2253.94 413.39,2224.41 659.45,2224.41 665.33,2224.41 819.4,2070.34 856.81,2032.93 v1(875.98,2032.93)
PB15: J3.17 U3.28 | length 1401.8
  Top Layer w10: v1(875.98,1988.19) 876.95,1989.15 904.55,1989.15 926.18,1967.52 U3.28@1002.95,1967.52
  Bottom Layer w10: 478.92,2525.86 443.6,2525.86 367.86,2450.12 364.17,2446.43 364.17,2250.99 406.76,2208.41 658.71,2208.41 803.4,2063.71 875.98,1991.13 v1(875.98,1988.19) ; 478.93,2525.84 531.26,2525.84 578.92,2525.86 697.59,2525.86 J3.17@755.1,2468.35
PC13: J2.2 R5.2 U3.2 | length 3306.2
  Top Layer w10: v1(701.99,2378.26) 701.99,2640.97 738.19,2677.17 2194.88,2677.17 2244.09,2627.95 2112.61,2496.47 2112.61,2444.52 2078.92,2410.83 2066.35,2410.83 2015.24,2359.73 1769.18,2359.73 1507.17,2097.72 1507.17,2068.02 1505.91,2066.76 1459.17,2020.02 1459.17,1848.17 1422.08,1811.08 1373.2,1811.08 1353.57,1830.71 U3.2@1338.58,1830.71
  Bottom Layer w10: R5.2@645.51,2356.46 680.19,2356.46 v1(701.99,2378.26)
PC14: J2.3 U3.3 | length 1335.1
  Top Layer w10: U3.3@1348.43,1850.39 1356.51,1850.39 1379.83,1827.08 1415.45,1827.08 1437.01,1848.64 1443.17,1854.8 1443.17,2026.65 1490.87,2074.35 1491.17,2074.65 1491.17,2105.36 1761.54,2375.73 2001.72,2375.73 2052.82,2426.83 2072.29,2426.83 2096.61,2451.15 2096.61,2500.15 2096.61,2503.09 2152.76,2559.24 J2.3@2152.76,2627.95
PC15: C15.1 J2.4 U3.4 U4.4 | length 1278.2
  Top Layer w10: U3.4@1319.88,1869.09 1360.44,1869.09 1379.14,1850.39 1386.45,1843.08 1408.82,1843.08 1416.14,1850.39 1427.17,1861.42 1427.17,2033.27 1459.17,2065.27 1475.17,2081.27 1475.17,2111.99 1754.91,2391.73 1971.45,2391.73 2007.87,2428.16 2012.61,2432.89 2012.61,2527.74 2052.76,2567.88 J2.4@2052.76,2627.95
PC16: C16.1 U4.1
RESET: C9.2 J2.17 R6.2 SW1.2 U3.7 | length 3657.8
  Top Layer w10: J2.17@752.76,2627.95 772.29,2608.42 772.29,2509.86 796.61,2485.54 796.61,2457.25 1023.62,2230.24 v1(1023.62,2215.88) ; v1(1232.18,2001.54) 1232.18,2006.87 1237.62,2006.87 1242.63,2011.88 1242.63,2012 1246.32,2015.68 1246.32,2022.89 1258.68,2035.26 1263.09,2035.26 1276.28,2035.26 1285.61,2044.59 1285.61,2079.91 1285.68,2079.99 1285.68,2184.53 1355.1,2253.94 v1(1361.01,2248.02) ; v1(1238.84,1923.65) 1275.26,1923.65 1279.76,1928.15 U3.7@1319.88,1928.15 ; v1(1899.61,1968.5) 1879.92,1988.19 SW1.2@1879.92,2047.24 1879.92,2322.83 1900.82,2343.73 2021.87,2343.73 2072.97,2394.83 2085.55,2394.83 2117.55,2426.83 2172.29,2426.83 2196.61,2451.15 2196.61,2491.88 2263.78,2559.06 v1(2266.73,2559.06)
  Bottom Layer w10: v1(1023.62,2215.88) 1078.83,2271.09 1337.94,2271.09 v1@1355.1,2253.94 ; v1(1232.18,2001.54) 1226.84,2006.89 1221.23,2001.29 1221.23,1974.93 1237.6,1958.57 1237.6,1930.71 1242.23,1926.07 1242.23,1923.65 v1(1238.84,1923.65) ; v1(1361.01,2248.02) v1@1355.1,2253.94 ; v1(1899.61,1968.5) 1998.03,1968.5 2007.87,1978.35 C9.2@2017.72,1968.5 ; C9.2@2007.87,1968.5 2007.98,1968.61 R6.2@2115.31,1968.61 ; v1(2266.73,2559.06) 2265.54,2557.86 1821.98,2557.86 1813.34,2549.21 1466.54,2549.21 1396.61,2479.29 1396.61,2451.15 1355.1,2409.64 v1@1355.1,2253.94
SWCLK: P2.3 U3.37 | length 2100
  Top Layer w10: U3.37@1053.15,1748.74 1053.15,1652.63 1233.14,1472.65 1385.02,1472.65 1424.39,1512.02 1483.4,1512.02 1503.08,1531.7 1601.51,1531.7 1622.51,1552.7 1638.07,1552.7 1710.12,1624.75 1710.12,1726.65 1760.43,1776.96 v1(1830.71,1776.96)
  Bottom Layer w10: v1(1830.71,1776.96) 1830.71,2033.39 1874.09,2076.77 1986.22,2076.77 2013.22,2103.77 2048.59,2103.77 2070.05,2103.77 2097.05,2076.77 P2.3@2500,2076.77
SWIO: P2.2 U3.34 | length 2297.8
  Top Layer w10: v1(911.26,1786.58) 913.49,1788.81 912.63,1789.67 912.63,1813.92 912.63,1834.21 927.83,1849.41 U3.34@1002.95,1849.41 ; v1(1437.01,1485.02) 1437.01,1486.22 1446.8,1496.02 1490.03,1496.02 1509.71,1515.7 1608.14,1515.7 1629.14,1536.7 1699.33,1536.7 1746.59,1583.96 1818.4,1655.77 1818.4,1726.47 1823.05,1731.12 1857.71,1765.78 1879.92,1787.99 1879.92,1896.95 1912.11,1929.13 2244.57,1929.13 2289.99,1974.55 2328.74,2013.3 2328.74,2035.49 2362.16,2068.91 2419.28,2068.91 2500,1988.19 P2.2@2500,1976.77
  Bottom Layer w10: v1(911.26,1786.58) 913.4,1786.58 915.35,1784.63 915.35,1746.65 1087.2,1574.8 1121.88,1574.8 1302.16,1574.8 1404.31,1472.65 1423.43,1472.65 1436.41,1485.62 v1(1437.01,1485.02)
V3: C18.1 U6.4 | length 249
  Top Layer w10: U6.4@590.55,1884.45 624.61,1884.45 649.61,1909.45 v1(649.61,1998.03)
  Bottom Layer w10: C18.1@570.87,2027.56 620.08,2027.56 v1(649.61,1998.03)
pads on no net: J2.1 J7.1 U4.2 U4.3 U6.9 U6.10 U6.11 U6.12 U6.13 U6.14 U6.15

## Keep-outs
Keep-Out Layer:
  lines w10: 1395.67,3071.07 1401.25,3074.21 ; 0,0 0,2755.91 2657.48,2755.91 2657.48,0 0,0

## Text inside footprints (layer, text, board x,y; h text height)
SW1: Top Overlay "REFDES" at 2095.37,2072.24 h50 r180; Top Overlay "RefDes" at 2082.87,2072.24 h50 r180
U2: Bottom Overlay "REFDES" at 1793.27,1553.06 h50
U4: Top Overlay "REFDES" at 1639.34,1894.29 h50; Top Overlay "*" at 1639.84,2038.56 h50; Top Overlay "RefDes" at 1651.84,1894.29 h50